# Altium PCB PCB1.PcbDoc (part 1 of 2)
Units mil, origin at the board's own origin, x right, y up, seen from the top; angles counter-clockwise.
Board outline 2720 x 1000 mil, 4 copper layers (L1, L2, L3, L4), stack 61.583 mil thick; 64 components, 73 nets, 298 pads, 153 vias.
Unrouted connection lines stored in the file: 1.
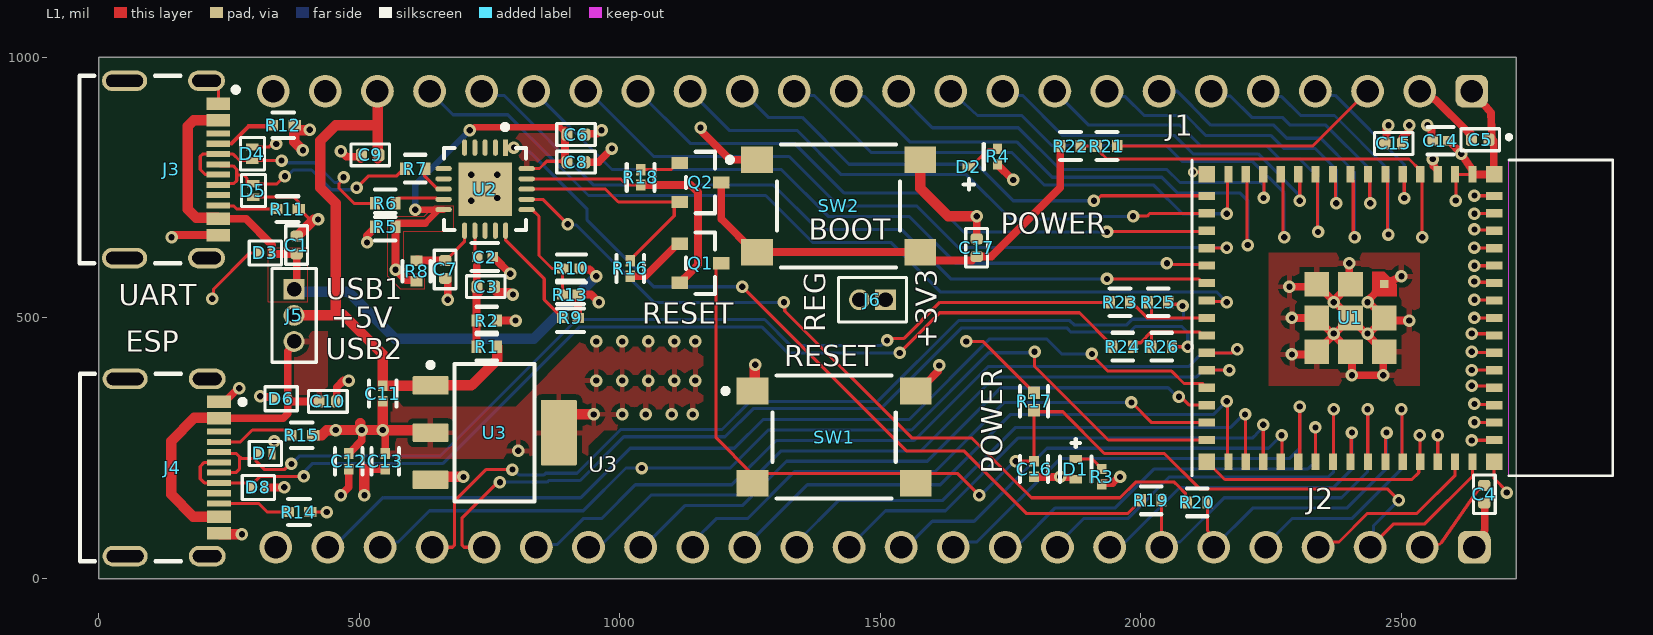
[diagram p0: L1 view]
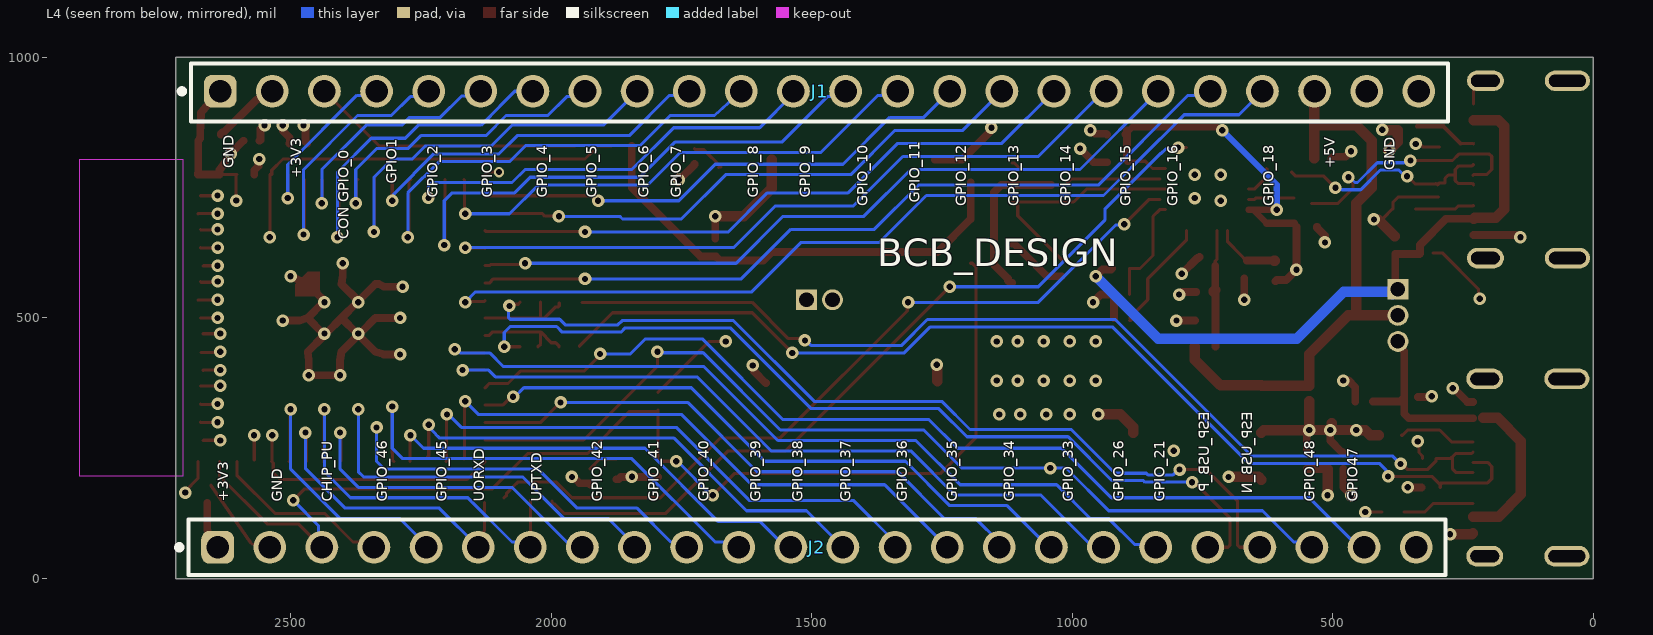
[diagram p1: L4 view, seen from below]
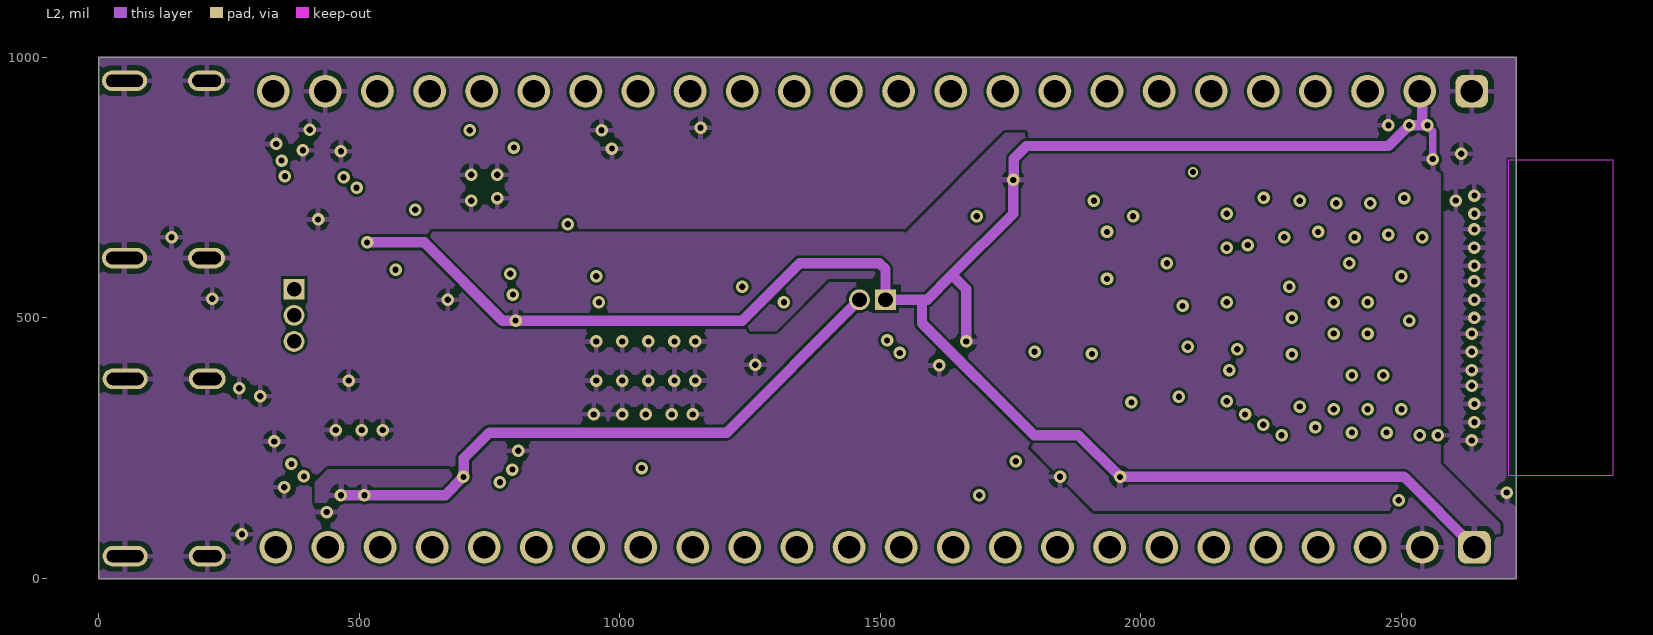
[diagram p2: L2]
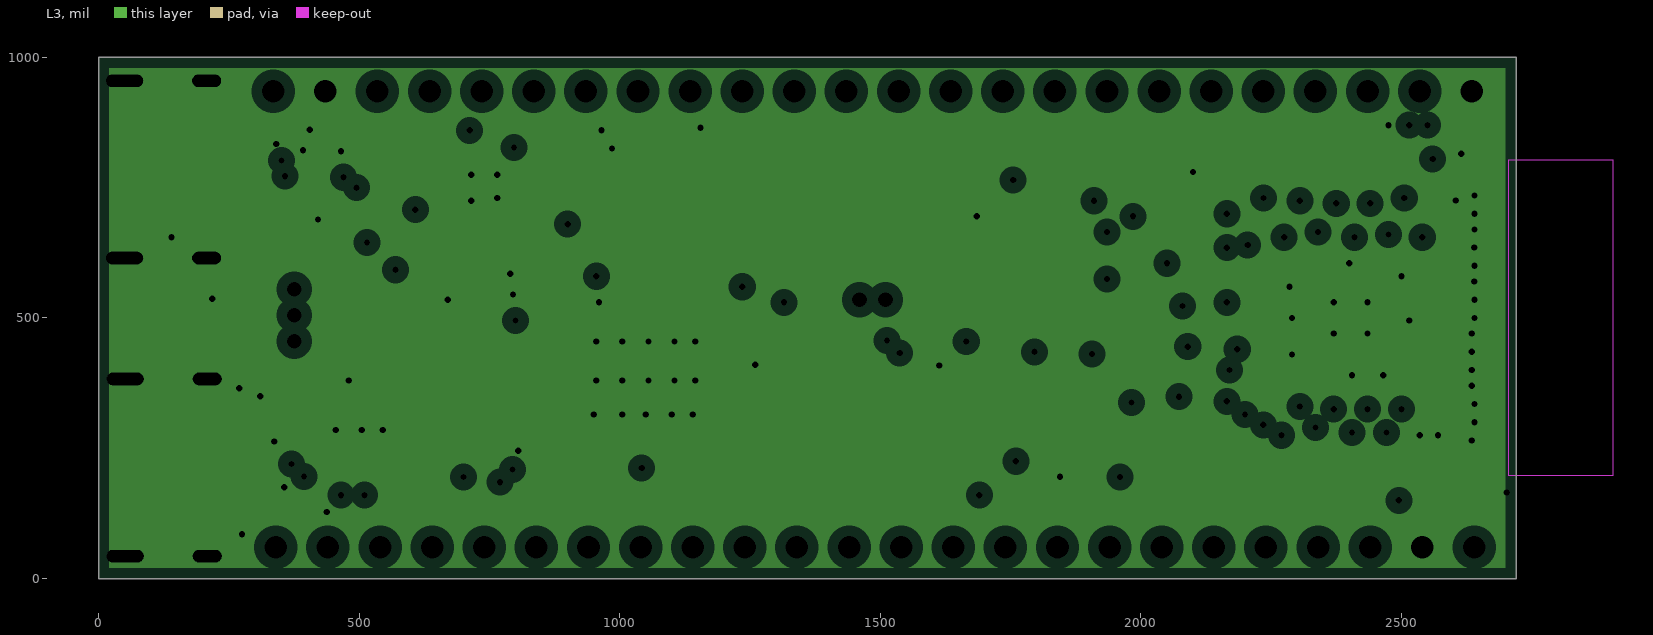
[diagram p3: L3, clearances drawn from the general rule]
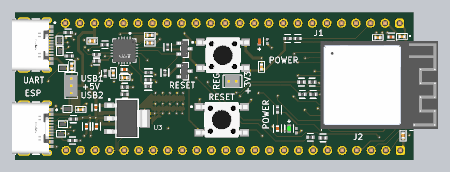
[diagram p4: 3D render of the assembled board from above, using the file's embedded part models]

## Layer stack, top to bottom
Top Solder: solder mask 0.4, Solder Resist, Dk 3.5
L1: signal copper 1.378
Dielectric 2: prepreg 3.9134, PP-006, Dk 4.1
L2: signal copper 0.5984
Dielectric 1: dielectric 49.8031, FR-4, Dk 4.8
L3: plane copper 0.5984, net GND
Dielectric 3: prepreg 3.9134, PP-006, Dk 4.1
L4: signal copper 1.378
Bottom Solder: solder mask 0.4, Solder Resist, Dk 3.5

## Board outline
0,0 2720,0 2720,1000 0,1000

## Design rules (kind name [scope] priority, off if disabled: settings)
Clearance "DiFF 90 Clearance" [InDifferentialPairClass('DiFF90')] p1: gap=8 ignorepadtopadclearanceinfootprint=FALSE
Clearance [All] p2: gap=5 ignorepadtopadclearanceinfootprint=FALSE
ComponentClearance R24R26 [InComponent('R24') vs InComponent('R26')] p1: gap=0 collisioncheckmode=3 verticalgap=10 showdistances=FALSE
ComponentClearance R23R25 [InComponent('R23') vs InComponent('R25')] p2: gap=0 collisioncheckmode=3 verticalgap=10 showdistances=FALSE
ComponentClearance R1R2 [InComponent('R1') vs InComponent('R2')] p3: gap=0 collisioncheckmode=3 verticalgap=10 showdistances=FALSE
ComponentClearance [All] p4: gap=10 collisioncheckmode=3 verticalgap=10 showdistances=FALSE
DiffPairsRouting DIFF90 [InDifferentialPairClass('All Differential Pairs')] p1: maxlimit=10 minlimit=8 mostfreqgap=8 toplayer_maxgap=8.1 toplayer_minwidth=6.03 toplayer_maxwidth=6.23 toplayer_prefwidth=6.03 midlayer1_maxgap=8.2 midlayer1_minwidth=5.1 midlayer1_maxwidth=5.2 midlayer1_prefwidth=5.1 bottomlayer_minwidth=6.03 bottomlayer_maxwidth=6.03 bottomlayer_prefwidth=6.03 maxuncoupledlength=500
MinimumSolderMaskSliver [All] p1: minsoldermaskwidth=3.5
PlaneClearance [All] p1: clearance=20
PlaneConnect [All] p1: pad.planeconnectstyle=Relief pad.reliefexpansion=20 pad.reliefentries=4 pad.reliefconductorwidth=20 pad.reliefairgap=10 via.planeconnectstyle=Direct via.reliefexpansion=20 via.reliefentries=4 via.reliefconductorwidth=10 via.reliefairgap=10
PolygonConnect [All] p1: connectstyle=Relief reliefconductorwidth=10 reliefentries=4 polygonreliefangle="90 Angle" airgapwidth=10
RoutingVias [All] p1: holewidth=12 width=24 viastyle="Through Hole" minholewidth=12 minwidth=24 maxholewidth=12 maxwidth=24
SilkToSilkClearance [All] p1: silktosilkclearance=6
SilkToSolderMaskClearance [IsPad] p1: minsilkscreentomaskgap=2.6 clearancetoexposedcopper=TRUE
SolderMaskExpansion [All] p1: expansion=2 istentingtop=FALSE
SupplyNets "Schematic Supply Nets_6" [InNet('+3V3')] p1: voltage=0.000
SupplyNets "Schematic Supply Nets_5" [InNet('GND')] p2: voltage=0.000
SupplyNets "Schematic Supply Nets_4" [InNet('+3V3_REG')] p3: voltage=0.000
SupplyNets "Schematic Supply Nets_2" [InNet('+5V_VBUS2')] p4: voltage=0.000
SupplyNets "Schematic Supply Nets_1" [InNet('+5V_VBUS1')] p5: voltage=0.000
SupplyNets "Schematic Supply Nets" [InNet('+5V')] p6: voltage=0.000
Width [All] p1: maxlimit=20 minlimit=6 preferedwidth=15 midlayer1_prefwidth=10 minimp=50.000000 maximp=50.000000 favimp=50.000000
23 further rules are at their usual default settings.

## Classes and differential pairs
differential pair CON1_USB: +CON1_USB_P -CON1_USB_N
differential pair FTDI_USB: +FTDI_USB_P -FTDI_USB_N
differential pair ESP_USB: +ESP_USB_P -ESP_USB_N
differential pair CON_ESP_USB: +CON_ESP_USB_P -CON_ESP_USB_N
differential pair CON2_USB: +CON2_USB_P -CON2_USB_N

## Components (designator, comment, footprint, x,y, rotation, side; value= is the part's Value field where it differs from the comment)
C1 "100nF,50v" CAPC1005X55N 380,640 r270 top value=100nF
C2 "4u7" FP-CL829-IPC_C 741.1,617 r180 top
C3 "100nF,50v" CAPC1005X55N 743.07,560 r180 top value=100nF
C4 "100nF,50v" CAPC1005X55N 2659,162 r270 top value=100nF
C5 "100nF,50v" CAPC1005X55N 2651,842 r180 top value=100nF
C6 "100nF,50v" CAPC1005X55N 916.07,852 r180 top value=100nF
C7 "100nF,50v" CAPC1005X55N 665,593.07 r90 top value=100nF
C8 "100nF,50v" CAPC1005X55N 916,799 r180 top value=100nF
C9 "100nF,50v" CAPC1005X55N 521,813 r0 top value=100nF
C10 "100nF,50v" CAPC1005X55N 440,340 r180 top value=100nF
C11 "4u7" FP-CL829-IPC_C 545,355 r270 top
C12 "CL05A106MP8NUB8" FP-CL07-IPC_C 480,225 r270 top
C13 "CL05A106MP8NUB8" FP-CL07-IPC_C 550,225 r270 top
C14 "10uF" FP-CL07-IPC_C 2575,840 r180 top
C15 "100nF,50v" CAPC1005X55N 2485,835 r0 top value=100nF
C16 "CL05A105KP5NNNC" FP-CL511-IPC_C 1795,210 r270 top
C17 "100nF,50v" CAPC1005X55N 1685,635 r270 top value=100nF
D1 "GREEN" FP-SM0402GC-MFG 1875,210 r270 top
D2 "RED" FP-SM0402RC-MFG 1670,809.5 r90 top
D3 "s?" SOD882 320,625 r0 top
D4 "s?" SOD882 295,815 r270 top
D5 "s?" SOD882 296.94,744.61 r90 top
D6 "s?" SOD882 350,345 r0 top
D7 "s?" SOD882 320,240 r180 top
D8 "s?" SOD882 306.53,174.92 r180 top
J1 "61302411121" 61302411121 1485,935 r180 bottom
J2 "61302411121" 61302411121 1490,60 r180 bottom locked
J3 "USB_C_connector" FP-2171790001-MFG 95,785 r270 top locked
J4 "USB_C_connector" FP-2171790001-MFG 96.16,213 r270 top
J5 "FTS-103-01-F-S" HDR_1X3_1.27MM 375,555 r0 top
J6 "FTS-102-01-F-S" HDR_1X2_1.27MM 1510,535 r270 top
Q1 "SS8050-G" FP-SS8050-G-MFG 1155,605 r0 top
Q2 "SS8050-G" FP-SS8050-G-MFG 1155,760 r0 top
R1 "RC0402JR-070RP" FP-RC0402-0_4-MFG 744.97,445 r180 top
R2 "RC0402JR-070RP" FP-RC0402-0_4-MFG 744.97,495 r180 top
R3 "1K" RESC1005X40X25LL05T10 1925,195.24 r270 top
R4 "RC0402FR-131KL" RESC1005X40X25LL05T10 1725,810 r270 top
R5 "0R" FP-RC0402-0_4-MFG 550,675 r0 top
R6 "27R" FP-AC0402-MFG 550,720 r0 top
R7 "27R" FP-AC0402-MFG 607.66,786.65 r0 top
R8 "0R" FP-RC0402-0_4-MFG 610,590 r90 top
R9 "10K" FP-CRGCQ0402-IPC_C 905.19,500 r180 top value=10KΩ
R10 "4K7" FP-CRGP0402-IPC_C 907.16,595 r0 top value=4.7KΩ
R11 "5K1" FP-RC1005-MFG 362.5,709 r180 top
R12 "5K1" FP-RC1005-MFG 354.44,870 r180 top
R13 "10K" FP-CRGCQ0402-IPC_C 905.19,545 r180 top value=10KΩ
R14 "5K1" FP-RC1005-MFG 384.45,127.66 r180 top
R15 "5K1" FP-RC1005-MFG 390,275 r180 top
R16 "10K" FP-CRGCQ0402-IPC_C 1020,595 r90 top value=10KΩ
R17 "RC1005F103CS" FP-RC1005-IPC_B 1795,340 r90 top
R18 "10K" FP-CRGCQ0402-IPC_C 1040,770 r270 top value=10KΩ
R19 "0" FP-RC0402-0_4-MFG 2020,150 r180 top
R20 "0" FP-RC0402-0_4-MFG 2108,146 r180 top
R21 "AC0402JR-0727RL" FP-AC0402-MFG 1935,830 r180 top
R22 "AC0402JR-0727RL" FP-AC0402-MFG 1865,830 r0 top
R23 "0" FP-RC0402-0_4-MFG 1960,530 r0 top
R24 "0" FP-RC0402-0_4-MFG 1965,445 r0 top
R25 "0" FP-RC0402-0_4-MFG 2033,530 r180 top
R26 "0" FP-RC0402-0_4-MFG 2040,445 r180 top
SW1 "PTS645SM43SMTR92 LFS" CKCP-PTS645S_V 1411.5,271.42 r0 top locked
SW2 "PTS645SM43SMTR92 LFS" CKCP-PTS645S_V 1420,715 r0 top locked
U1 "ESP32-S3-MINI-1-N8" XCVR_ESP32-S3-MINI-1-N8 2402.24,500.04 r270 top locked
U2 "FT231XQ-R" FP-QFN-20-MFG 741.63,747.28 r270 top locked
U3 "TL1963A-33DCYR" DCY0004A_N 760,280 r0 top locked

## Footprints (in the part's own frame and the unit in brackets; to place one, negate y for a bottom-side part, rotate by r counter-clockwise, add the part's x,y. Pads: shape width x height; smd on the part's side, far side on the other; paste and mask are expansions set on the pad)
61302411121 [mm] "Pin Header, pitch 2.54 mm, THT, Vertical, single row, 24p"
  rrect50% 1.6x1.6 hole 1.1: 1(-29.21,0)
  round 1.6 hole 1.1: 2(-26.67,0) 3(-24.13,0) 4(-21.59,0) 5(-19.05,0) 6(-16.51,0) 7(-13.97,0) 8(-11.43,0) 9(-8.89,0) 10(-6.35,0) 11(-3.81,0) 12(-1.27,0) 13(1.27,0) 14(3.81,0) 15(6.35,0) 16(8.89,0) 17(11.43,0) 18(13.97,0) 19(16.51,0) 20(19.05,0) 21(21.59,0) 22(24.13,0) 23(26.67,0) 24(29.21,0)
  silkscreen extent -31.2,-1.47 30.63,1.34, body extent -30.48,-1.27 30.48,1.27, height 5.57
CAPC1005X55N [mm]
  rrect53% 0.54x0.6 smd: 1(-0.43,0) 2(0.43,0)
  silkscreen extent -0.94,-0.53 0.94,0.53, body extent -0.5,-0.25 0.5,0.25, height 0.55
CKCP-PTS645S_V [mm] "THD, 4-Leads, Body 6x6mm, Pitch 4.5mm"
  rect 1.55x1.3 smd: 1(-3.975,2.25) 2(3.975,2.25) 3(-3.975,-2.25) 4(3.975,-2.25)
  silkscreen extent -5.42,-3 3,3, body extent -4.5,-3 4.5,3, height 4.3
DCY0004A_N [mm] "SOT223, 4-Leads, Body 6.7x3.7mm, Pitch 2.3mm, IPC Medium Density"
  rrect11% 1.75x0.9 smd: 1(-3.125,2.3) 2(-3.125,0) 3(-3.125,-2.3)
  rrect6% 1.75x3.2 smd: 4(3.125,0)
  silkscreen extent -3.25,-3.35 1.95,3.42, body extent -3.5,-3.25 3.5,3.25, height 1.62
FP-2171790001-MFG [mm]
  rect 0.6x1.15 smd paste+0 mask+0: A1B12(-3.2,3.425) A4B9(-2.4,3.425) B1A12(3.2,3.425) B4A9(2.4,3.425)
  rect 0.3x1.15 smd paste+0 mask+0: A5(-1.25,3.425) A6(-0.25,3.425) A7(0.25,3.425) A8(1.25,3.425) B5(1.75,3.425) B6(0.75,3.425) B7(-0.75,3.425) B8(-1.75,3.425)
  rrect100% 1x1.8 hole 1.4 slot 0.6 at 0 deg paste-2539.97 mask+0: S1(-4.32,2.85) S2(4.32,2.85)
  rrect100% 1x2.2 hole 1.8 slot 0.6 at 0 deg paste-2539.97 mask+0: S3(-4.32,-1.15) S4(4.32,-1.15)
  silkscreen extent -4.57,-3.35 4.57,4.39, body extent -4.92,-3.45 4.92,4.1, height 0.25
FP-AC0402-MFG [mm]
  rect 0.5x0.6 smd paste+0 mask+0: 1(-0.5,0) 2(0.5,0)
  silkscreen extent -0.5,-0.67 0.5,0.67, body extent -0.85,-0.4 0.85,0.4, height 0.25
FP-CL07-IPC_C [mil]
  rect 20.29x18.6 smd paste+0 mask+0: 1(-14.9,0) 2(14.9,0)
  silkscreen extent -25,-27 25,27, body extent -29,-15 29,15, height 10
FP-CL511-IPC_C [mil]
  rect 20.29x18.6 smd paste+0 mask+0: 1(-14.9,0) 2(14.9,0)
  silkscreen extent -25,-27 25,27, body extent -29,-15 29,15, height 10
FP-CL829-IPC_C [mil]
  rect 20.29x18.6 smd paste+0 mask+0: 1(-14.9,0) 2(14.9,0)
  silkscreen extent -25,-27 25,27, body extent -29,-15 29,15, height 10
FP-CRGCQ0402-IPC_C [mil]
  rect 22.03x18.6 smd paste+0 mask+0: 1(-14.81,0) 2(14.81,0)
  silkscreen extent -26,-27 26,27, body extent -30,-15 30,15, height 10
FP-CRGP0402-IPC_C [mil]
  rect 22.03x18.6 smd paste+0 mask+0: 1(-16.78,0) 2(16.78,0)
  silkscreen extent -28,-27 28,27, body extent -32,-15 32,15, height 10
FP-QFN-20-MFG [mm]
  rect 0.8x0.25 smd paste+0 mask+0: 1(-2.025,1)
  rrect100% 0.8x0.25 smd paste+0 mask+0: 2(-2.025,0.5) 3(-2.025,0) 4(-2.025,-0.5) 5(-2.025,-1) 11(2.025,-1) 12(2.025,-0.5) 13(2.025,0) 14(2.025,0.5) 15(2.025,1)
  rrect100% 0.25x0.8 smd paste+0 mask+0: 6(-1,-2.025) 7(-0.5,-2.025) 8(0,-2.025) 9(0.5,-2.025) 10(1,-2.025) 16(1,2.025) 17(0.5,2.025) 18(0,2.025) 19(-0.5,2.025) 20(-1,2.025)
  rect 2.6x2.6 smd paste+0 mask+0: 21(0,0)
  silkscreen extent -3.15,-2 2,2, body extent -2.52,-2.52 2.52,2.52, height 0.25
FP-RC0402-0_4-MFG [mm]
  rect 0.5x0.6 smd paste+0 mask+0: 1(-0.5,0) 2(0.5,0)
  silkscreen extent -0.5,-0.67 0.5,0.67, body extent -0.85,-0.4 0.85,0.4, height 0.25
FP-RC1005-IPC_B [mil]
  rect 24.23x22.54 smd paste+0 mask+0: 1(-16.87,0) 2(16.87,0)
  silkscreen extent -29,-27 29,27, body extent -35,-17 35,17, height 10
FP-RC1005-MFG [mm]
  rect 0.6x0.5 smd paste+0 mask+0: 1(-0.55,0) 2(0.55,0)
  silkscreen extent -0.53,-0.62 0.53,0.62, body extent -0.95,-0.38 0.95,0.38, height 0.25
FP-SM0402GC-MFG [mil]
  rect 16x24 smd paste+0 mask+0: 1(-19.5,0) 2(19.5,0)
  silkscreen extent -58,-30 25,31, body extent -31,-18 31,18, height 10
FP-SM0402RC-MFG [mil]
  rect 16x24 smd paste+0 mask+0: 1(-19.5,0)
  silkscreen extent -63,-29 24,10, body extent -31,-18 31,18, height 10
FP-SS8050-G-MFG [mm]
  rect 0.8x0.6 smd paste+0 mask+0: 1(-1.01,0.95) 2(-1.01,-0.95) 3(1.01,0)
  silkscreen extent -0.7,-1.5 0.7,1.5, body extent -1.51,-1.6 1.51,1.6, height 0.25
HDR_1X2_1.27MM [mil]
  rect 40x40 hole 28: 1(0,0)
  round 40 hole 28: 2(0,-50)
  silkscreen extent -43,-90 43,40, body extent -43,-75 43,25, height 154
HDR_1X3_1.27MM [mil]
  rect 40x40 hole 28: 1(0,0)
  round 40 hole 28: 2(0,-50) 3(0,-100)
  silkscreen extent -42,-140 42,40, body extent -42,-125 42,25, height 154
RESC1005X40X25LL05T10 [mm] "Chip Resistor, 2-Leads, Body 1.00x0.50mm, IPC High Density"
  rect 0.5x0.45 smd: 1(-0.375,0) 2(0.375,0)
  body extent -0.53,-0.27 0.53,0.28, height 0.4
SOD882 [mm]
  rect 0.35x0.6 smd: 1(-0.325,0) 2(0.325,0)
  silkscreen extent -0.79,-0.58 0.79,0.58, body extent -0.54,-0.34 0.54,0.34, height 0.44
XCVR_ESP32-S3-MINI-1-N8 [mm]
  rect 0.8x0.4 smd: 1(-7,5.95) 2(-7,5.1) 3(-7,4.25) 4(-7,3.4) 5(-7,2.55) 6(-7,1.7) 7(-7,0.85) 8(-7,0) 9(-7,-0.85) 10(-7,-1.7) 11(-7,-2.55) 12(-7,-3.4) 13(-7,-4.25) 14(-7,-5.1) 15(-7,-5.95) 31(7,-5.95) 32(7,-5.1) 33(7,-4.25) 34(7,-3.4) 35(7,-2.55) 36(7,-1.7) 37(7,-0.85) 38(7,0) 39(7,0.85) 40(7,1.7) 41(7,2.55) 42(7,3.4) 43(7,4.25) 44(7,5.1) 45(7,5.95)
  rect 0.4x0.8 smd: 16(-5.95,-7) 17(-5.1,-7) 18(-4.25,-7) 19(-3.4,-7) 20(-2.55,-7) 21(-1.7,-7) 22(-0.85,-7) 23(0,-7) 24(0.85,-7) 25(1.7,-7) 26(2.55,-7) 27(3.4,-7) 28(4.25,-7) 29(5.1,-7) 30(5.95,-7) 46(5.95,7) 47(5.1,7) 48(4.25,7) 49(3.4,7) 50(2.55,7) 51(1.7,7) 52(0.85,7) 53(0,7) 54(-0.85,7) 55(-1.7,7) 56(-2.55,7) 57(-3.4,7) 58(-4.25,7) 59(-5.1,7) 60(-5.95,7)
  rect 1.2x1.2 smd: 61(0,0) 67(0,1.65) 68(1.65,1.65) 69(-1.65,0) 70(1.65,0) 71(-1.65,-1.65) 72(0,-1.65) 73(1.65,-1.65)
  rect 0.8x0.8 smd: 62(-7,7) 63(-7,-7) 64(7,-7) 65(7,7)
  rect 0.4x0.4 smd paste-1 mask+0: 66(-1.65,1.65)
  L1 region: -1.05,1.05 -2.25,1.05 -2.25,1.65 -1.65,2.25 -1.05,2.25
  Keep-Out Layer region: 7.7,7.725 -7.7,7.725 -7.7,12.775 7.7,12.775
  Keep-Out Layer region: 7.7,7.725 -7.7,7.725 -7.7,12.775 7.7,12.775
  silkscreen extent -8.91,-7.72 7.7,12.77, body extent -7.93,-7.88 7.47,12.62, height 2.55

## Part data
C1 C3 C4 C5 C6 C7 C8 C9 C10 C15 C17: library part CL05B104KB54PNC, Case/Package=0402, Dielectric Material=Ceramic, Manufacturer="Samsung Electro-Mechanics", Max Operating Temperature=125°C, Min Operating Temperature=-55°C, Supplier Part Number=8121545, Tolerance=10%, Voltage Rating=50V, Category="Ceramic Capacitors", China RoHS=Compliant, ComponentLink1Description=https://datasheet.octopart.com:443/CL05B104KB54PNC-Samsung-Electro-Mechanics-datasheet-182018727.pdf?src-supplier=IHS, ComponentLink1URL=https://datasheet.octopart.com:443/CL05B104KB54PNC-Samsung-Electro-Mechanics-datasheet-182018727.pdf?src-supplier=IHS, ComponentLink2Description=https://datasheet.octopart.com:443/CL05B104KB54PNC-Samsung-Electro-Mechanics-datasheet-138685816.pdf?src-supplier=Samsung+SCT, ComponentLink2URL=https://datasheet.octopart.com:443/CL05B104KB54PNC-Samsung-Electro-Mechanics-datasheet-138685816.pdf?src-supplier=Samsung+SCT, ComponentLink3Description=https://datasheet.octopart.com:443/CL05B104KB54PNC-Samsung-datasheet-8326407.pdf?src-supplier=TME, ComponentLink3URL=https://datasheet.octopart.com:443/CL05B104KB54PNC-Samsung-datasheet-8326407.pdf?src-supplier=TME, Country of Origin="Mainland China, Philippines, South Korea", Export Control Classification Number (ECCN) Code=EAR99, Harmonized Tariff Schedule (HTS) Code=8532.24.00.20, Height=500µm, Introduction Date=2018-07-31, Length=1mm, Lifecycle Status=Production, Manufacturer Part Number=CL05B104KB54PNC, Material=Ceramic, Mounting Technology="Surface Mount", Number of Terminals=2, Pricing="10000=0.0042, 30000=0.0041, 50000=0.004, 200000=0.0039, 300000=0.0038 (USD)", REACH SVHC=Yes, RoHS=Compliant, Schedule B="8532240020, 8532240020|8532240020|8532240020|8532240020|8532240020|8532240020|8532240020|8532240020|8532240020|8532240020|8532240020|8532240020|8532240020|8532240020|8532240020|8532240020|8532240020|8532240020|8532240020|8532240020|8532240020|8532240020|8532240020|85", Stock=3520000, Supplier="Future Electronics", Voltage Rating (DC)=50V, Width=500µm
C2 C11: library part CMP-13271-001468-1, "Cap Ceramic 4.7uF 16V X5R ±20% SMD 0402 +85°C Paper T/R", Capacitance=4.7uF, Case Code (Imperial)=0402, Case Code (Metric)=1005, Max Operating Temperature=85°C, Min Operating Temperature=-55°C, Tolerance=20%, Voltage Rating=16V, Case/Package=0402, Length=0.039inch, Mount="Surface Mount", Packaging="Tape and Reel", Thickness=0.022inch, Width=0.02inch
C12 C13: library part CMP-13271-002778-1, "Cap Ceramic 10uF 10V X5R ±20% SMD 0402 +85°C Paper T/R", Capacitance=10uF, Case Code (Imperial)=0402, Case Code (Metric)=1005, Max Operating Temperature=85°C, Min Operating Temperature=-55°C, Tolerance=20%, Voltage Rating=10V, Case/Package=0402, Length=0.039inch, Mount="Surface Mount", Packaging="Tape and Reel", Thickness=0.035inch, Width=0.02inch
C14: library part CMP-13271-002778-1, "Cap Ceramic 10uF 10V X5R ±20% SMD 0402 +85°C Paper T/R", Case Code (Imperial)=0402, Case Code (Metric)=1005, Max Operating Temperature=85°C, Min Operating Temperature=-55°C, Tolerance=20%, Voltage Rating=10V, Capacitance=10uF, Case/Package=0402, Length=0.039inch, Mount="Surface Mount", Packaging="Tape and Reel", Thickness=0.035inch, Width=0.02inch
C16: library part CMP-13271-001936-1, "Cap Ceramic 1uF 10V X5R ±10% SMD 0402 +85°C Paper T/R", Capacitance=1uF, Case Code (Imperial)=0402, Case Code (Metric)=1005, Dielectric=X5R, Max Operating Temperature=85°C, Min Operating Temperature=-55°C, Package Quantity=1, Tolerance=10%, Voltage Rating=10V, Case/Package=0402, Contact Plating=Tin, Depth=0.5mm, Height=0.5mm, Length=1mm, Material=Ceramic, Mount="Surface Mount", Packaging="Tape and Reel", Radiation Hardening=No, Thickness=0.022inch, Width=0.02inch
D1: library part CMP-35283-000001-2, "LED GREEN CLEAR 0402 SMD", Case Code (Imperial)=0402, Case Code (Metric)=1005, Color=Green, Forward Voltage=1.9V, Lens Color=Colorless, Test Current=20mA, Case/Package=0402, Dominant Wavelength=572nm, Height=0.71mm, Length=1mm, Lens Size=1mm, Lens Style=Flat, Lens Transparency=Clear, Luminous Intensity=28.5mcd, Mount="Surface Mount", Packaging="Tape and Reel", Viewing Angle=130°, Width=0.5mm
D2: library part CMP-35283-000003-1, "LED RED CLEAR 0402 SMD", Case Code (Imperial)=0402, Case Code (Metric)=1005, Color=Red, Forward Voltage=2.1V, Lens Color=Colorless, Test Current=20mA, Case/Package=0402, Dominant Wavelength=631nm, Height=0.71mm, Length=1mm, Lens Size=1mm, Lens Style=Flat, Lens Transparency=Clear, Luminous Intensity=90mcd, Mount="Surface Mount", Packaging="Tape and Reel", Viewing Angle=130°, Width=0.5mm
D3 D4 D5 D6 D7 D8: library part AQ3045-01ETG
J1 J2: library part CMP-1502-01109-4, "THT Vertical Pin Header WR-PHD, Pitch 2.54 mm, Single Row, 24 pins", Color=Black, Contact Resistance=20mΩ, Current Rating=3A, Operating Supply Voltage=250V, Connector Type="Male Pin", Contact Material=Copper, Contact Mating Length=5.9944mm, Contact Plating=Gold, Gender=Male, Lead Pitch=2.54mm, Mount="Through Hole", Number of Contacts=24, Number of Pins=24, Number of Positions=24, Number of Rows=1, Orientation=Vertical, Packaging=Bulk, Pitch=2.54mm, RoHS=Compliant, Termination=Solder
J3 J4: LCSC part number=C3197684
J5: Manufacturer=Samtec, Manufacturer Lifecycle Status=PRODUCTION, Supplier Part Number=3657477, Category="Headers and Wire Housings", ComponentLink1Description=https://datasheet.octopart.com:443/FTS-103-01-F-S-Samtec-datasheet-97029283.pdf?src-supplier=Newark, ComponentLink1URL=https://datasheet.octopart.com:443/FTS-103-01-F-S-Samtec-datasheet-97029283.pdf?src-supplier=Newark, ComponentLink2Description=https://datasheet.octopart.com:443/FTS-103-01-F-S-Samtec-datasheet-165596534.pdf?src-supplier=Newark, ComponentLink2URL=https://datasheet.octopart.com:443/FTS-103-01-F-S-Samtec-datasheet-165596534.pdf?src-supplier=Newark, ComponentLink3Description=https://sigma.octopart.com:443/97029285/technical_drawing/Samtec-FTS-103-01-F-S.pdf?src-supplier=element14+APAC, ComponentLink3URL=https://sigma.octopart.com:443/97029285/technical_drawing/Samtec-FTS-103-01-F-S.pdf?src-supplier=element14+APAC, ComponentLink4Description=https://datasheet.octopart.com:443/FTS-103-01-F-S-Samtec-datasheet-118493358.pdf?src-supplier=Electro+Sonic, ComponentLink4URL=https://datasheet.octopart.com:443/FTS-103-01-F-S-Samtec-datasheet-118493358.pdf?src-supplier=Electro+Sonic, ComponentLink5Description=https://datasheet.octopart.com:443/FTS-103-01-F-S-Samtec-datasheet-176663378.pdf?src-supplier=Toby+Electronics, ComponentLink5URL=https://datasheet.octopart.com:443/FTS-103-01-F-S-Samtec-datasheet-176663378.pdf?src-supplier=Toby+Electronics, ComponentLink6Description=https://datasheet.octopart.com:443/FTS-103-01-F-S-Samtec-datasheet-116535195.pdf?src-supplier=Toby+Electronics, ComponentLink6URL=https://datasheet.octopart.com:443/FTS-103-01-F-S-Samtec-datasheet-116535195.pdf?src-supplier=Toby+Electronics, ComponentLink7Description=https://datasheet.octopart.com:443/FTS-103-01-F-S-Samtec-datasheet-136395376.pdf?src-supplier=Toby+Electronics, ComponentLink7URL=https://datasheet.octopart.com:443/FTS-103-01-F-S-Samtec-datasheet-136395376.pdf?src-supplier=Toby+Electronics, ComponentLink8Description=https://datasheet.octopart.com:443/FTS-103-01-F-S-Samtec-datasheet-151470456.pdf?src-supplier=Sager+Electronics, ComponentLink8URL=https://datasheet.octopart.com:443/FTS-103-01-F-S-Samtec-datasheet-151470456.pdf?src-supplier=Sager+Electronics, Contact Plating=Gold, Gender=Male, Lifecycle Status=Production, Manufacturer Part Number=FTS-103-01-F-S, Mounting Technology="Through Hole", Number of Contacts=3, Number of Rows=1, Packaging=Bulk, Pitch=1.27mm, Pricing="10=0.79, 50=0.612, 100=0.516, 250=0.473, 500=0.43 (EUR)", Radiation Hardening=No, RoHS=Compliant, Stock=11, Supplier=Farnell, Termination=Solder
J6: Manufacturer=Samtec, Manufacturer Lifecycle Status=PRODUCTION, Supplier Part Number=200-FTS10201FS, Category="Headers and Wire Housings", ComponentLink1Description=https://datasheet.octopart.com:443/FTS-102-01-F-S-Samtec-datasheet-97029283.pdf?src-supplier=Newark, ComponentLink1URL=https://datasheet.octopart.com:443/FTS-102-01-F-S-Samtec-datasheet-97029283.pdf?src-supplier=Newark, ComponentLink2Description=https://sigma.octopart.com:443/97029285/technical_drawing/Samtec-FTS-102-01-F-S.pdf?src-supplier=Newark, ComponentLink2URL=https://sigma.octopart.com:443/97029285/technical_drawing/Samtec-FTS-102-01-F-S.pdf?src-supplier=Newark, ComponentLink3Description=https://datasheet.octopart.com:443/FTS-102-01-F-S-Samtec-datasheet-118493358.pdf?src-supplier=Electro+Sonic, ComponentLink3URL=https://datasheet.octopart.com:443/FTS-102-01-F-S-Samtec-datasheet-118493358.pdf?src-supplier=Electro+Sonic, ComponentLink4Description=https://datasheet.octopart.com:443/FTS-102-01-F-S-Samtec-datasheet-165596534.pdf?src-supplier=JRH+Electronics, ComponentLink4URL=https://datasheet.octopart.com:443/FTS-102-01-F-S-Samtec-datasheet-165596534.pdf?src-supplier=JRH+Electronics, ComponentLink5Description=https://datasheet.octopart.com:443/FTS-102-01-F-S-Samtec-datasheet-176663378.pdf?src-supplier=Toby+Electronics, ComponentLink5URL=https://datasheet.octopart.com:443/FTS-102-01-F-S-Samtec-datasheet-176663378.pdf?src-supplier=Toby+Electronics, ComponentLink6Description=https://datasheet.octopart.com:443/FTS-102-01-F-S-Samtec-datasheet-116535195.pdf?src-supplier=Toby+Electronics, ComponentLink6URL=https://datasheet.octopart.com:443/FTS-102-01-F-S-Samtec-datasheet-116535195.pdf?src-supplier=Toby+Electronics, ComponentLink7Description=https://datasheet.octopart.com:443/FTS-102-01-F-S-Samtec-datasheet-136395376.pdf?src-supplier=Toby+Electronics, ComponentLink7URL=https://datasheet.octopart.com:443/FTS-102-01-F-S-Samtec-datasheet-136395376.pdf?src-supplier=Toby+Electronics, ComponentLink8Description=https://datasheet.octopart.com:443/FTS-102-01-F-S-Samtec-datasheet-151470456.pdf?src-supplier=Sager+Electronics, ComponentLink8URL=https://datasheet.octopart.com:443/FTS-102-01-F-S-Samtec-datasheet-151470456.pdf?src-supplier=Sager+Electronics, Contact Plating=Gold, Gender=Male, Lifecycle Status=Production, Manufacturer Part Number=FTS-102-01-F-S, Mounting Technology="Through Hole", Number of Contacts=2, Number of Rows=1, Packaging=Bulk, Pitch=1.27mm, Pricing="1=0.49, 10=0.49, 50=0.425, 100=0.36, 1000=0.268, 10000=0.133 (USD)", Radiation Hardening=No, RoHS=Compliant, Stock=1186, Supplier=Mouser, Termination=Solder
Q1 Q2: library part CMP-20235-000001-1, "NPN TRANSISTOR 1.5A 40V SOT-23 R", Case/Package=TO-236-3, Collector Emitter Breakdown Voltage=25V, Collector Emitter Voltage (VCEO)=400mV, Max Collector Current=1.5A, Max Power Dissipation=300mW, Transition Frequency=100MHz, Max Breakdown Voltage=25V, Mount="Surface Mount", Packaging="Tape and Reel", RoHS Compliant=Yes
R1 R2 R5 R8 R19 R20 R23 R24 R25 R26: library part CMP-03412-037830-1, "RES SMD 0 OHM JUMPER 1/16W 0402", Case Code (Imperial)=0402, Case Code (Metric)=1005, Max Operating Temperature=155°C, Max Power Dissipation=63mW, Min Operating Temperature=-55°C, Resistance=0mR, Resistor Type="Thick Film", Case/Package=0402, Features="Moisture Resistant", Height=0.016inch, Length=0.039inch, Number of Terminations=2, Packaging="Tape and Reel", RoHS Compliant=Yes, Width=0.02inch
R3: library part CMP-2002-07865-1, Manufacturer=Yageo, Part Number=RC0402FR-131KL
R4: library part CMP-2002-07865-1, Manufacturer=Yageo, Part Number=RC0402FR-131KL
R6 R7: library part CMP-03412-042158-1, "RES 27Ω ±5% 0.063W 0402", Case/Package=0402, Max Operating Temperature=155°C, Max Power Dissipation=63mW, Min Operating Temperature=-55°C, Resistor Type="Thick Film", Temperature Coefficient=100ppm/°C, Tolerance=5%, Features="Moisture Resistant", Height=0.015inch, Length=0.039inch, Number of Terminations=2, Packaging="Tape and Reel", Resistance=27R, RoHS Compliant=Yes, Series=AC, Width=0.02inch
R9 R13 R16 R18: library part CMP-03211-008081-1, "CRGCQ 0402 10K 5%", Ambient Temperature Range High=+70°C, Manufacturer="TE Connectivity", Manufacturer Part Number=CRGCQ0402J10K, Package=CRGCQ0402, Power Rating=0.0625W, Resistance=10KΩ, Temperature="-55°C to +155°C", Temperature Coefficient=±100ppm/°C, Temperature Range High=+155°C, Temperature Range Low=-55°C, Tolerance=0.05, Voltage Rating=50V, Automotive=Yes, Category=Res, ComponentLink2Description=Datasheet, ComponentLink2URL=https://www.te.com/commerce/DocumentDelivery/DDEController?Action=showdoc&DocId=Data+Sheet%7F1773204-3%7F1%7Fpdf%7FEnglish%7FENG_DS_1773204-3_1.pdf%7F4-2176347-923, Composition="Thick Film", Device Class L1="Passive Components", Device Class L2=Resistors, Device Class L3="Chip SMD Resistors", Digikey Description="CRGCQ 0402 10K 5%", Height=0.4mm, Ipc Land Pattern Name=RESC10050X35, Lead Free=Yes, Mouser Description="Res Thick Film 0402 10K Ohm 5% 0.063W(1/16W) ±100ppm/C Pad SMD Automotive T/R", Octopart=https://octopart.com/crgcq0402j10k-te+connectivity-91017993, RoHS=TRUE, Series=CRGCQ
R10: library part CMP-03211-000629-1, "CRGP0402 4.7KΩ 0.125W ±100ppm/°C 1% 50V", Manufacturer=TE, Manufacturer Part Number=CRGP0402F4K7, Package=CRGP0402, Power Rating=0.125W, Resistance=4.7KΩ, Temperature="-55°C to +155°C", Temperature Coefficient=±100ppm/°C, Temperature Range High=+155°C, Temperature Range Low=-55°C, Tolerance=0.01, Voltage Rating=50V, Automotive=No, Category=Res, ComponentLink2Description=Datasheet, ComponentLink2URL=https://www.mouser.ca/datasheet/2/418/NG_DS_9-1773463-9_A-1358566.pdf, Composition="Thick Film", Device Class L1="Passive Components", Device Class L2=Resistors, Device Class L3="Chip SMD Resistors", Height=0.4mm, Ipc Land Pattern Name=RESC11050X35, Lead Free=Yes, Octopart=https://octopart.com/crgp0402f4k7-te+connectivity-91018703, RoHS=TRUE, Series=CRGP
R11 R12 R14 R15: library part CMP-13261-001006-1, "Res Thick Film 0402 5.1kΩ 5% 0.063W ±100ppm/°C Molded SMD T/R", Case Code (Imperial)=0402, Case Code (Metric)=1005, Max Operating Temperature=155°C, Max Power Dissipation=63mW, Min Operating Temperature=-55°C, Package Quantity=10000, Resistance=5.1kR, Temperature Coefficient=100ppm/°C, Tolerance=5%, Voltage Rating (DC)=50V, Case/Package=0402, Composition="Thick Film", Contact Plating=Tin, Features="Moisture Resistant", Height=0.016inch, Lead Free="Lead Free", Length=0.039inch, Number of Terminations=2, Packaging="Tape and Reel", Power Rating=63mW, Radiation Hardening=No, Width=0.02inch
R17: library part CMP-13261-004522-1, "Res Thick Film 0402 10kΩ 1% 0.063W ±100ppm/°C Molded SMD T/R", Case Code (Imperial)=0402, Case Code (Metric)=1005, Max Operating Temperature=155°C, Max Power Dissipation=63mW, Min Operating Temperature=-55°C, Package Quantity=1, Power Rating=62.5mW, Resistance=10kR, Temperature Coefficient=100ppm/°C, Tolerance=1%, Case/Package=0402, Composition="Thick Film", Contact Plating=Tin, Depth=0.5mm, Features="Moisture Resistant", Height=0.016inch, Length=1mm, Military Standard=Not, Mount="Surface Mount", Number of Terminations=2, Packaging="Tape and Reel", Radiation Hardening=No, Width=0.02inch
R21 R22: library part CMP-03412-042158-1, "RES 27Ω ±5% 0.063W 0402", Case/Package=0402, Max Operating Temperature=155°C, Max Power Dissipation=63mW, Min Operating Temperature=-55°C, Resistance=27R, Resistor Type="Thick Film", Temperature Coefficient=100ppm/°C, Tolerance=5%, Features="Moisture Resistant", Height=0.015inch, Length=0.039inch, Number of Terminations=2, Packaging="Tape and Reel", RoHS Compliant=Yes, Series=AC, Width=0.02inch
SW1 SW2: library part CMP-2000-07594-1, "Tact Switch, SPST-NO, 50 mA, -20 to 60 degC, 4-Pin SMD, RoHS, Tape and Reel", Case\/Package=SMD/SMT, Colour=Black, Contact Resistance=100mOhm, Current Rating=50mA, Manufacturer="C&K Components", Max Operating Temperature=60degC, Max Voltage Rating (DC)=12V, Min Operating Temperature=-20degC, Operating Force=160gf, Package Description="4-Pin Surface Mount Device, Body 6 x 6 mm, Pitch 4.5 mm", Package Quantity=1000, Package Reference=PTS645S, Actuator Length=0.85mm, Actuator Material=Polyamide, Contact Material=Silver, Contact Plating=Silver, Datasheet URL=http://www.ckswitches.com/media/1471/pts645.pdf, Datasheet Version=04/2016, Depth=9mm, Illumination Type=Illuminated, Lead Free=LeadFree, Length=6mm, Manufacturer URL=http://www.ckswitches.com/, Max Current Rating=50mA, Mechanical Life=100000Cycles, Mount=SurfaceMount, Mounting Technology=SurfaceMount, Orientation=Straight, Packaging=TapeandReel, REACH SVHC=NoSVHC, RoHSCompliant=True, Switch Function=Off-Mom, Termination=GullWing, Throw Configuration=SPST, Voltage Rating (DC)=12V
U1: "20.5dBm ESP32-S3FN8 Chip 2.4GHz SMD WiFi Modules ROHS", LCSC pad number=C2913206, Manufacturer="Espressif Systems", Supplier Part Number=5407-ESP32-S3-MINI-1-N8CT-ND, Category="RF Transceiver Modules and Modems", ComponentLink1Description=https://datasheet.octopart.com:443/ESP32-S3-MINI-1-N8-Espressif-Systems-datasheet-188867343.pdf?src-supplier=TME, ComponentLink1URL=https://datasheet.octopart.com:443/ESP32-S3-MINI-1-N8-Espressif-Systems-datasheet-188867343.pdf?src-supplier=TME, ComponentLink2Description=https://datasheet.octopart.com:443/ESP32-S3-MINI-1-N8-Espressif-Systems-datasheet-165560562.pdf?src-supplier=TME, ComponentLink2URL=https://datasheet.octopart.com:443/ESP32-S3-MINI-1-N8-Espressif-Systems-datasheet-165560562.pdf?src-supplier=TME, ComponentLink3Description=https://datasheet.octopart.com:443/ESP32-S3-MINI-1-N8-Espressif-Systems-datasheet-165560559.pdf?src-supplier=TME, ComponentLink3URL=https://datasheet.octopart.com:443/ESP32-S3-MINI-1-N8-Espressif-Systems-datasheet-165560559.pdf?src-supplier=TME, ComponentLink4Description=https://datasheet.octopart.com:443/ESP32-S3-MINI-1-N8-Espressif-Systems-datasheet-192318068.pdf?src-supplier=HQonline, ComponentLink4URL=https://datasheet.octopart.com:443/ESP32-S3-MINI-1-N8-Espressif-Systems-datasheet-192318068.pdf?src-supplier=HQonline, Manufacturer Part Number=ESP32-S3-MINI-1-N8, Pricing="1=5.28, 10=4.566, 25=4.3196, 100=3.9802, 250=3.7768 (USD)", RoHS=Compliant, Stock=3118, Supplier=DigiKey
U2: library part CMP-0248-00001-3, "IC USB SERIAL FULL UART 20QFN", Case/Package=QFN, Max Operating Temperature=85°C, Max Supply Voltage=5.5V, Min Operating Temperature=-40°C, Min Supply Voltage=2.97V, Operating Supply Current=8mA, Package Quantity=5000, Data Rate=12Mbps, Interface=UART, Lead Free="Lead Free", Mount="Surface Mount", Number of Channels=1, Number of Pins=20, Packaging="Tape and Reel", Weight=0.004339oz
U3: library part CMP-0395-00535-2, "Single Output Low Noise LDO, 1.5 A, Fixed 3.3 V Output, 2.1 to 20 V Input, 4-pin SOT-223 (DCY), -40 to 125 degC, Green (RoHS & no Sb/Br)", Manufacturer="Texas Instruments", Accuracy(%)=3, Code_JEDEC=TO-261, ComponentLink1Description="Manufacturer URL", ComponentLink1URL=http://www.ti.com/, ComponentLink2Description=Datasheet, ComponentLink2URL=http://www.ti.com/general/docs/lit/getliterature.tsp?genericPartNumber=TL1963A-33&fileType=pdf, ComponentLink3Description="Package Specification", ComponentLink3URL=http://www.ti.com/litv/pdf/mpds094a, DatasheetVersion=SLVS719F, Eco-Plan="Green (RoHS & no Sb/Br)", Fixed Output Options(V)=3.3, Iout(Max)(A)=1.5, Iq(Typ)(mA)=1, Mounting Technology="Surface Mount", PackageDescription="4-Pin Plastic Small Outline, Body 3.5 x 6.5 mm, Pitch 2.3 mm", PackageReference=DCY0004A, PackageVersion=4202506/B, PartNumber=TL1963A-33DCYR, SubFamily="Single Channel LDO", Vdo(Typ)(mV)=340, Vin(Max)(V)=20, Vin(Min)(V)=2.1, Vout Adj(Max)(V)=3.3, Vout Adj(Min)(V)=3.3

## Via types
v1: diameter 24, hole 12, L1 to L4, tented both sides, 149 vias
v2: diameter 24, hole 12, L1 to L4, tented top, 3 vias
v3: diameter 20, hole 12, L1 to L4, tented both sides, 1 vias

## Nets (pads, with @x,y where several pads share a name; then routed paths per layer and width w, separated by ;. In a path a pad name is that pad's centre, name@x,y a point inside that pad or via, vN(x,y) a via of type N, cw(c..) or ccw(c..) an arc to the next point about the centre after c; other vN are vias at no path point)
+3V3: C4.2 C5.2 C14.2 C15.2 J1.2 J2.1 J6.1 R2.1 R3.2 R4.2 R5.1 R17.2 U1.3 | length 4616.8
  L1 w6: v1(1665,455) 1696.87,455 1787.89,363.99 1788.73,363.99 1795,357.72 R17.2
  L1 w15: v1(515,645) 515,657.72 530.31,673.03 R5.1 ; R2.1 v1(800,495) ; R4.2 1725,794.25 1754.25,765 v1(1755,765) ; R3.2 1925,181.46 1926.36,182.81 1945.38,182.81 1957.56,195 v1(1960,195) ; C15.2 2501.57,839.31 2501.57,845.7 2515,859.14 v1(2515,870) ; J1.2@2532.31,925.82 2557.17,925.82 2564.04,918.94 2565.31,918.94 2627.94,856.31 2630.94,856.31 2634.07,853.18 C5.2@2634.07,852 ; v1(2550,870) 2557.45,862.55 2557.45,841.8 2559.25,840 C14.2 ; v1(2560,805) 2561.72,803.28 2561.72,791.35 2569.57,783.5 U1.3 ; J2.1 2658.9,78.9 2658.9,91.69 2660,92.78 C4.2@2660,145.06
  L2 w15: v1(2550,870) 2550,867.56 2560,857.56 v1(2560,805)
  L2 w20: v1(515,645) 625,645 775,495 v1(800,495) 1235,495 1345,605 1498.28,605 1510,593.28 J6.1 1580,535 ; v1(1665,455) 1665,555 1637.5,582.5 ; J1.2 2540,930 2540,870 v1(2515,870) 2475,830 1780,830 1755.77,805.77 1755.77,765.77 v1(1755,765) 1755,700 1637.5,582.5 ; J2.1 2505,195 v1(1960,195) 1880,275 1795,275 1580,490 1580,535 ; 1580,535 1590,535 1637.5,582.5
"+3V3  FTDI": C6.2 C8.2 R5.2 R8.1 U2.10 U2.20 | length 806.9
  L1 w6: R5.2 569.68,676.97 R5.2@574.53,681.81 ; U2.20 821.43,786.72 845.98,786.72 859.94,800.69 C8.2@889.94,800.69
  L1 w12: v1(607.66,707.91) U2.10@652.91,707.91 ; 626.81,681.81 U2.10@652.91,707.91 ; U2.10 U2.10@652.91,707.91 ; v1(712,860) 715.25,860 721.25,866 885.14,866 893.33,857.81 894.51,857.81 899.14,853.18 C6.2
  L1 w15: R5.2 v1(569.68,592.63) 589.66,572.66 607.66,572.66 R8.1 ; R5.2@574.53,681.81 626.81,681.81 ; C8.2@892.94,800.69 C8.2@894.26,802.01 ; C8.2@895.07,805 895.07,852 C6.2@895.07,860
  L4 w12: v1(607.66,707.91) 607.66,755.66 v1(712,860)
+3V3_REG: C12.2 C13.2 J6.2 U3.3 | length 1382.6
  L1 w15: v1(465,160) 480,175 C12.2 ; 510,210.1 C13.2
  L1 w20: v1(510,160) 510,210.1 ; U3.3 642.52,195 v1(700,195)
  L2 w20: v1(465,160) v1(510,160) 665,160 v1(700,195) 700.77,195.77 700.77,230.77 750,280 1205,280 J6.2
+5V: C9.2 C11.1 J1.22 J5.2 R1.1 U3.1 | length 1117.4
  L1 w6: J1.22 J1.22@535.97,934.03 ; C9.2@535.97,805.97 C9.2@536.93,805
  L1 w20: J5.2 455,505 ; 525,870 455,870 425,840 425,750 455,720 455,505 ; C9.2@535.97,805.97 J1.22@535.97,934.03 ; R1.1 764.65,419.65 715.55,370.55 U3.1 636.32,369.9 C11.1 545,430 470,505 455,505
+5V_VBUS1: C1.2 D3.2 J3.A4B9 J3.B4A9 J5.1 R10.2 | length 1251.9
  L1 w6: J3.B4A9 J3.B4A9@230.1,690.26
  L1 w15: J3.B4A9@230.1,690.26 282.74,690.26 332.8,640.2 D3.2 ; D3.2@332.8,623.68 333.41,623.07 C1.2 J5.1@380,560 ; R10.2 925.74,593.2 941.8,593.2 949.99,585.01 v1(955,580)
  L1 w20: J3.B4A9 228.03,692.32 187.68,692.32 171,709 171,867.77 182.72,879.49 J3.A4B9
  L4 w20: J5.1 J5.1@380,550 ; J5.1@385,545 J5.1@380,550 ; v1(955,580) 835,460 568.79,460 478.79,550 J5.1@380,550
+5V_VBUS2: C10.2 D6.2 J4.A4B9 J4.B4A9 J5.3 | length 644.4
  L1 w15: J4.A4B9 354.01,307.49 362.8,316.27 D6.2 ; J5.3 375,448.24 362.8,436.03 D6.2 ; C10.2 370.57,340 365.57,345 D6.2
  L1 w20: J4.A4B9@211.3,308.36 183.71,308.36 139,263.65 139,161.35 181.84,118.51 J4.B4A9
"+VCC FTDI": C2.2 C3.2 R1.2 R2.2 U2.12 | length 226.2
  L1 w6: U2.12 721.94,620 721.94,613.06 725.58,609.42 725.58,600
  L1 w15: R1.2 R2.2 725.28,547.21 C3.2@728.07,550 ; C3.2@725.58,553.67 725.58,600
  L1 w20: C3.2@725.58,553.67 728.07,551.18 C3.2@728.07,550
BTN_GPIO_0: C17.2 Q2.3 R22.1 SW2.3 SW2.4 | length 891.4
  L1 w15: Q2.3 1194.76,690.24 1258.58,626.42 SW2.3 SW2.4 1592.91,610 1675.75,610 1683.82,618.07 C17.2 1713.07,618.07 1845.32,750.31 R22.1
CHIP_PU: C16.1 J2.3 Q1.3 R17.1 SW1.3 SW1.4 U1.45 | length 2281.9
  L1 w6: Q1.3 1191.81,605 1185,598.19 1185,270 1253.58,201.42 1258.5,201.42 1571.5,201.42 1648.58,201.42 v1(1690,160) ; v1(1760,225) v1(1760,225) 1794.95,224.95 C16.1 ; C16.1@1795,230.05 R17.1 1798.13,320 1850,320 1930,240 2045,240 2113,172 2473,172 v1(2495,150) ; J2.3 2485,105 2545,105 2636.5,196.5 U1.45
  L4 w6: v1(1690,160) 1692.5,160 1757.5,225 v1(1760,225) ; J2.3 2446.5,66.5 2446.5,101.5 v1(2495,150)
CON1_USB_N: D4.2 J3.A7 J3.B7 R6.1 | length 485
  L1 w6.03: J3.A7@231.02,773.98 J3.A7 229.68,775 205,775 195,785 195,810 199.53,814.53 258.03,814.53 270.35,802.2 D4.2 295.12,802.08 v1(351,802.08) ; v1(470,770) 470,766.13 461.35,757.48 461.35,748.65 490,720 R6.1 540.32,720
  L4 w6.03: v1(351,802.08) 354.44,798.65 362.87,798.65 363.52,798 414.55,798 452.49,760.06 457.48,760.06 467.42,770 v1(470,770)
CON1_USB_P: D5.2 J3.A6 J3.B6 R7.1 | length 469.2
  L1 w6.03: J3.B6 232.73,758.36 259.83,758.36 265,763.53 265,774.27 ; J3.A6 232.73,791.95 258.05,791.95 265,785 265,774.27 ; v1(357.38,772.08) 356.97,772.08 342.29,757.41 302.75,757.41 301.78,758.38 298.87,755.47 295,759.35 284.66,759.35 284.66,767.87 278.27,774.27 265,774.27 ; v1(495,750) 517.19,772.19 571.16,772.19 R7.1@579.39,780.42
  L4 w6.03: v1(357.38,772.08) 361.91,772.08 361.91,772.58 373.3,783.97 408.74,783.97 446.68,746.03 482.48,746.03 483.01,746.56 491.56,746.56 v1(495,750)
CON2_USB_N: D7.2 J4.A7 J4.B7 R23.1 | length 1965.5
  L1 w6.03: J4.A7 263.16,203.16 270,210 270,234.26 267.13,237.13 ; J4.B7 233.53,240 264.26,240 267.13,237.13 ; v1(370,220) 368.06,220 357.48,209.42 317.86,209.42 302.2,225.08 302.2,230 274.26,230 267.13,237.13 ; v1@1516.46,460.42 1544.7,460.42 1614.28,530 R23.1
  L4 w6.03: v1(370,220) 385,235 655.16,235 917.19,497.03 1277.97,497.03 1328.03,446.97 1500.5,446.97 1510.51,456.98 v1(1513.02,456.98)
CON2_USB_P: D8.2 J4.A6 J4.B6 R24.1 | length 2031.6
  L1 w6.03: J4.A6 202.84,222.84 195,215 195,191.31 202.84,183.47 289.86,183.47 D8.2@291.94,181.4 ; D8.2@293.65,183.11 295.45,181.31 295.45,181.56 297.61,183.72 297.86,183.72 310.1,195.96 v1(394.04,195.96) ; D8.2 D8.2@293.74,179.6 ; v1(1537.06,432.94) 1614.12,510 1882.28,510 1945.31,446.97 R24.1
  L4 w6.03: v1(394.04,195.96) 397.48,199.4 397.48,207.48 410.97,220.97 660.97,220.97 923,483 1272.16,483 1322.22,432.94 v1(1537.06,432.94)
"CON GPIO_0": J1.3 R21.1 | length 523.8
  L1 w6: R21.1 2330,830 J1.3
CON_ESP_USB_N: J2.21 R25.1 | length 1742.8
  L1 w6.03: J2.21 648.81,68.81 657.61,60 679.02,60 682.55,63.53 682.55,148.39 743.16,209 v1(794,209)
  L1 w6.23: R25.1@2059.68,530 2063.28,526.4 2076.6,526.4 v1(2080,523)
  L4 w6.03: v1(794,209) 796.51,209 806.52,198.99 854.86,198.99 857.91,202.04 918.04,202.04 1002,286 1196.16,286 1250.16,340 1495.16,340 1650.16,495 1863.71,495 1871.85,486.86 1972.93,486.86 1983.71,497.64 2078.59,497.64 2082.12,501.18 2082.12,520.88 v1(2080,523)
CON_ESP_USB_P: J2.20 R26.1 | length 1713.5
  L1 w6.03: J2.20 700.98,60 697.45,63.53 697.45,116.65 765.76,184.96 v1(769.96,184.96)
  L1 w6.23: R26.1 v1(2090,445)
  L4 w6.03: v1(769.96,184.96) 860.67,184.96 863.72,188.01 923.85,188.01 1007.81,271.97 1201.97,271.97 1255.97,325.97 1500.97,325.97 1655.97,480.97 1857.9,480.97 1866.04,472.83 1978.74,472.83 1989.53,483.61 2078.59,483.61 2090,472.2 2090,451.88 2086.56,448.44 v1(2090,445)
"DTR FTDI": Q2.2 R16.2 U2.18 | length 458.6
  L1 w6: U2.18 835,747.28 972.72,747.28 997.4,722.6 Q2.2 1111.3,722.6 1104.49,715.79 1104.49,696.02 1020,611.53 R16.2
ESP_USB_N: R23.2 R25.2 U1.23 | length 186.6
  L1 w6.23: R23.2@1984.37,528.03 1984.37,523.35 1986.41,521.3 1991.1,521.3 2012.36,500.04 2020.31,500.04 ; R25.2@2020.31,530 2020.31,500.04 ; U1.23 2046.9,500.04 2020.31,500.04
ESP_USB_P: R24.2 R26.2 U1.24 | length 187.2
  L1 w6.23: R24.2 1984.68,445.77 1991.41,452.5 1999.59,452.5 2020.31,473.22 ; R26.2@2025.32,445 2020.31,450 2020.31,473.22 ; U1.24 2118.78,466.57 2112.13,473.22 2020.31,473.22
FTDI_RESET: C7.2 R8.2 U2.11 | length 127
  L1 w6: C7.2 665.84,610 677.56,621.72 700.84,645 702.26,646.42 U2.11
  L1 w15: R8.2@611.97,610 C7.2
  L1 w20: R8.2@611.65,609.69 R8.2@611.97,610
FTDI_USB_N: R6.2 U2.9 | length 88.1
  L1 w6.03: R6.2@575,730.42 647.22,730.42 650.05,727.59 U2.9
FTDI_USB_P: R7.2 U2.8 | length 62.2
  L1 w6.03: R7.2 625,784.3 625,773 650.72,747.28 U2.8
GND: C1.1 C2.1 C3.1 C4.1 C5.1 C6.1 C7.1 C8.1 C9.1 C10.1 C11.2 C12.1 C13.1 C14.1 C15.1 C16.2 C17.1 D1.2 D3.1 D4.1 D5.1 D6.1 D7.1 D8.1 J1.1 J1.23 J2.2 J3.A1B12 J3.B1A12 J3.S1 J3.S2 J3.S3 J3.S4 J4.A1B12 J4.B1A12 J4.S1 J4.S2 J4.S3 J4.S4 R9.1 R11.1 R12.1 R13.1 R14.1 R15.1 SW1.1 SW1.2 SW2.1 SW2.2 U1.1 U1.2 U1.42 U1.43 U1.46 U1.47 U1.48 U1.49 U1.50 U1.51 U1.52 U1.53 U1.54 U1.55 U1.56 U1.57 U1.58 U1.59 U1.60 U1.61 U1.62 U1.63 U1.64 U1.65 U1.66 U1.67 U1.68 U1.69 U1.70 U1.71 U1.72 U1.73 U2.21 U3.2 U3.4 | length 4925.1
  L1 w6: J3.S1 215,955.08 229.84,940.24 J3.A1B12 ; v1(218,537) 220.68,539.68 220.68,555.68 290,625 D3.1 ; D4.1 326.58,827.8 332.78,834 v2(340.85,834) ; D5.1 374.87,731.82 384.15,722.53 R11.1 386.12,709 403.44,691.68 418.32,691.68 v1(421,689) ; D7.1@327.8,230 327.8,234.92 334.69,241.81 334.69,260.48 v1(337.2,263) ; R14.1 v2(437.57,127.66) ; v3(2100,780) 2122.28,780 U1.63 ; U1.64 2161.1,190 2520,190 2533.23,203.23 2533.23,221.57 U1.42 2535.55,225 2535.55,274.45 v1(2535,275) ; J2.2 2573.95,66.16 2576.79,69.01 2652.82,178.74 C4.1@2653,179 ; U1.43@2569.78,227.46 2569.78,274.78 v1(2570,275) ; U1.2 U1.1 ; v1@2604.67,725.49 U1.2@2604.67,772.81 ; v1(2635,265) 2635.39,265.39 2667.09,265.39 2667.54,264.94 U1.46@2667.54,264.78 ; v1(2635,370) 2635.22,369.78 U1.49@2672.54,369.78 ; v1(2635,400) 2635.18,399.82 2667.5,399.82 U1.50@2667.54,399.78 ; v1(2635,435) 2635.94,434.06 U1.51@2671.81,434.06 ; v1(2635,470) 2635.22,469.78 U1.52@2667.54,469.78 ; v1(2639.78,570.22) 2641.41,568.59 2671.35,568.59 U1.55@2672.54,569.78 ; v1(2639.78,635.22) 2640.44,634.56 2672.31,634.56 U1.57@2672.54,634.78 ; v1(2640,300) 2640.37,299.63 2672.38,299.63 U1.47@2672.54,299.78 ; v1(2640,335) 2641.14,333.86 2671.61,333.86 U1.48@2672.54,334.78 ; v1(2640.02,500.02) U1.53@2672.3,500.02 ; v1(2640,535) 2640.75,534.25 2677.01,534.25 U1.54@2677.11,534.36 ; v1(2640,600) 2640.22,600.22 2667.1,600.22 U1.56@2667.54,599.78 ; v1(2640,670) 2641.32,668.68 2671.44,668.68 U1.58@2672.54,669.78 ; v1(2640,700) 2640.41,700.41 2676.91,700.41 U1.59@2677.32,700 ; v1(2640,735) 2640.35,734.65 2672.4,734.65 U1.60@2672.54,734.78 ; U1.65 2677.83,191.95 2702,167.79 v1(2702,165)
  L1 w15: v1(140,655) 142.44,655 146.45,659.02 J3.B1A12 ; J4.A1B12 241.83,338.98 267.84,365 v1(270,365) ; v1(310,350) 311.72,348.28 D6.1@336.59,348.28 ; 330,174.92 356.3,174.92 v1(356.38,175) ; C10.1 456.93,366.93 470,380 v1(480,380) ; v1(465,820) 475.69,809.31 499.94,809.31 503.07,806.18 C9.1@503.07,805 ; C12.1 480,240.75 481.8,242.55 482.64,242.55 505,264.9 v1(505,285) ; C13.1 v1@550,278.92 ; v1(670,535) C7.1@670,576.14 ; C2.1 757.8,615.2 759.7,615.2 v1(789.9,585) ; C3.1@761.93,550 790,550 v1(795,545) ; R9.1 R13.1 945,545 v1(960,530) ; C8.1 959,799 975,815 ; C6.1@933.32,852 934.98,853.66 956.23,853.66 962.56,860 v1(965,860) ; v1@1152.5,862.5 1211.42,803.58 SW2.1 ; SW1.2@1587.91,375 1611.28,398.36 1611.28,407.28 v1(1613,409) ; C17.1 v1@1685,685 ; C16.2 v1(1845,195.1) 1866.4,195.1 1871,190.5 D1.2 ; v1(2285,560) 2321.16,560 2330.83,565 U1.71 2370,532.28 v1(2370,530) ; v1(2290,430) 2321.16,430 U1.73 2370,467.8 v1(2370,470) ; v1(2290,500) 2321.16,500 U1.72 2365.6,471.72 2368.28,471.72 v1(2370,470) ; v1(2400,605) 2400,581.12 U1.69 2371.72,534.48 2371.72,531.72 v1(2370,530) ; 2450,550 2450,547.44 2435,532.44 v1(2435,530) 2437.24,530 U1.67 ; U1.66 2467.58,565.37 v1(2500,580) ; C15.1 2471.2,838.13 2471.2,863.76 2475,867.56 v1(2475,870) ; v1(2515,495) 2483.33,495 U1.67 ; C14.1 2590.75,840 2615,815.75 v1(2615,815) 2636.12,783.88 U1.1 U1.62 2676.99,783.88 2676.99,835.69 2676.93,840 2673.8,844.31 2673.47,852.23 2671.75,893.91 2650.75,919.25 J1.1 ; v1(2370,470) 2372.21,470 U1.61 ; v1(2370,470) 2371.72,468.28 2371.72,465.6 U1.70 2405,418.96 v1(2405,390) v1(2465,390) 2465,418.96 U1.68 2436.72,465.56 2436.72,468.28 v1(2435,470) ; v1(2370,530) 2372.28,530 U1.61 ; U1.61 2430.56,471.72 2433.28,471.72 v1(2435,470) ; v1(2435,470) 2437.17,470 U1.67
  L1 w20: J4.B1A12 232.81,85.2 253.12,85.2 253.32,85 v1(275,85) ; C1.1@381.18,656.93 412.49,688.23 420.23,688.23 v1(421,689) ; v1(392,822) 375.65,838.35 375.65,860.23 404.23,860.23 v1(405,861) ; R15.1 428.33,275 437.57,284.23 454.23,284.23 v1(455,285) v1(505,285) ; 501.93,298.07 501.93,289.15 505,286.08 v1(505,285) ; C11.2 v1(545,285) ; U3.2 632.73,284.23 545.77,284.23 v1(545,285) ; U3.4 883.03,290.55 907.48,315 v1(950,315) ; SW1.1@1258.5,378.58 1259.23,379.31 1259.23,409.23 v1(1260,410) ; SW2.2 1576.5,748.5 1630,695 v1(1685,695) ; v1(505,285) v1(545,285)
  other v1: 805,245 1005,315 1050,315 1100,315 1140,315 955,380 1005,380 1055,380 1105,380 1145,380 955,455 1005,455 1055,455 1105,455 1145,455 715,725 2604.45,725.28 765,730 715,775 765,775 985,825 1155,865
GPIO_0: R21.2 R22.2 U1.4 | length 790.7
  L1 w6: R22.2 R21.2 ; R21.2@1920,820 1935,805 2514.61,805 2536.1,783.5 U1.4 ; U1.4@2538.9,775.55 2539.45,775 2539.45,655.55 v1(2540,655)
GPIO_1: J1.4 U1.5 | length 338.3
  L1 w6: v1(2505.41,730.21) U1.5@2505.42,775.54
  L4 w6: J1.4 2342.88,927.12 2372.88,927.12 2505.41,794.59 v1(2505.41,730.21)
GPIO_2: J1.5 U1.6 | length 533.5
  L1 w6: U1.6@2473.9,765.55 2473.48,765.14 2473.48,661.52 v1(2475,660)
  L4 w6: J1.5 2245.14,924.86 2270.14,924.86 2306.5,888.5 2371.5,888.5 2475,785 v1(2475,660)
GPIO_3: J1.6 U1.7 | length 478.7
  L1 w6: v1(2440,720) 2439.25,720.75 2439.25,764.8 2440,765.55 U1.7@2440.43,765.55
  L4 w6: J1.6 2144.14,925.86 2171.61,925.86 2212.47,885 2271.42,885 2286.42,870 2355,870 2440,785 v1(2440,720)
GPIO_4: J1.7 U1.8 | length 679.4
  L1 w6: U1.8@2403.9,765.55 2406.77,765.55 2407.52,764.8 2407.52,657.48 v1(2410,655)
  L4 w6: J1.7 2070,935 2097.53,907.47 2097.53,906.71 2134.24,870 2255,870 2280,845 2345,845 2410,780 v1(2410,655)
GPIO_5: J1.8 U1.9 | length 615.4
  L1 w6: U1.9@2370.83,765.55 2372.54,765.55 2373.29,764.8 2373.29,721.71 v1(2375,720)
  L4 w6: J1.8 1945.14,924.86 1970.14,924.86 2006.5,888.5 2086.5,888.5 2125,850 2249.85,850 2274.85,825 2335,825 2375,785 v1(2375,720)
GPIO_6: J1.9 U1.10 | length 783.9
  L1 w6: U1.10@2338.11,769.76 2338.74,769.13 2338.74,666.26 v1(2340,665)
  L4 w6: J1.9 1900,870 2075,870 2115,830 2241.57,830 2266.57,805 2305,805 2340,770 v1(2340,665)
GPIO_7: J1.10 U1.11 | length 704.3
  L1 w6: v1(2305,725) 2304.82,725.18 2304.82,766.16 U1.11@2305,766.34
  L4 w6: J1.10 1742.88,927.12 1772.88,927.12 1850,850 2065,850 2100,815 2225,815 2302.32,737.68 2302.32,727.68 v1(2305,725)
GPIO_8: J1.11 U1.12 | length 919.5
  L1 w6: U1.12@2268.9,765.55 2272.34,765.55 2273.09,764.8 2273.09,656.91 v1(2275,655)
  L4 w6: J1.11 1686.66,888.5 1771.5,888.5 1829,831 2049,831 2080,800 2215,800 2275,740 v1(2275,655)
GPIO_9: J1.12 U1.13 | length 838.8
  L1 w6: v1(2235.34,730.34) 2236.53,731.53 2236.53,764.8 2237.28,765.55 U1.13@2238.11,765.55
  L4 w6: J1.12 1535,930 1600,865 1765,865 1845,785 2050,785 2075,760 2229.48,760 2235.34,754.14 v1(2235.34,730.34)
GPIO_10: J1.13 U1.14 | length 1068
  L1 w6: U1.14@2203.9,765.55 2203.9,641.1 v1(2205,640)
  L4 w6: J1.13 1445.14,924.86 1470.14,924.86 1557.5,837.5 1762.5,837.5 1830,770 2040,770 2070,740 2190,740 2205,725 v1(2205,640)
GPIO_11: J1.14 U1.15 | length 993.7
  L1 w6: v1(2165,700) 2166.5,701.5 2166.5,764.88 U1.15@2167.13,765.51
  L4 w6: J1.14 1342.88,927.12 1372.88,927.12 1482.5,817.5 1752.5,817.5 1815,755 2025,755 2080,700 v1(2165,700)
GPIO_12: J1.15 U1.16 | length 982.8
  L1 w6: v1(1910,725) 1913.79,725 1923.43,734.65 2126.3,734.65 U1.16
  L4 w6: J1.15 1285,885 1350,885 1440,795 1685,795 1755,725 v1(1910,725)
GPIO_13: J1.16 U1.17 | length 1097.6
  L1 w6: v1(1985,695) 1985.41,695.41 2012,695.41 2017,700.41 2126.24,700.41 U1.17
  L4 w6: J1.16 1210,860 1340,860 1425,775 1665,775 1750,690 1863.11,690 1868.11,695 v1(1985,695)
GPIO_14: J1.17 U1.18 | length 1204.5
  L1 w6: v1(1935,665) 1936.18,666.18 2125.47,666.18 U1.18
  L4 w6: J1.17 1135,835 1335,835 1430,740 1585,740 1660,665 v1(1935,665)
GPIO_15: J1.18 U1.19 | length 1393.1
  L1 w6: U1.19 2127.2,634.45 2164.45,634.45 v1(2165,635)
  L4 w6: J1.18 940,935 1065,810 1325,810 1420,715 1570,715 1650,635 v1(2165,635)
GPIO_16: J1.19 U1.20 | length 1430.2
  L1 w6: v1(2050,605) 2052.28,602.72 2115.9,602.72 2118.19,600.43 U1.20
  L4 w6: J1.19 985,785 1310,785 1400,695 1555,695 1645,605 v1(2050,605)
GPIO_17: J1.20 U1.21 | length 1544.1
  L1 w6: v1(1935,575) 2110.75,575 2118.78,566.97 U1.21
  L4 w6: J1.20 742.88,927.12 777.88,927.12 950,755 1295,755 1380,670 1540,670 1635,575 v1(1935,575)
GPIO_18: J1.21 U1.22 | length 1737.6
  L1 w6: U1.22 2128.4,531.75 2163.25,531.75 v1(2165,530)